# Altium PCB PCB1.PcbDoc
Units mil, origin at the board's own origin, x right, y up, seen from the top; angles counter-clockwise.
Board outline 6299 x 3937 mil, 4 copper layers (Component Side, Ground Plane, Signal Layer 1, Solder Side), stack 33.234 mil thick; 62 components, 56 nets, 405 pads, 33 vias.
Unrouted connection lines stored in the file: 6.
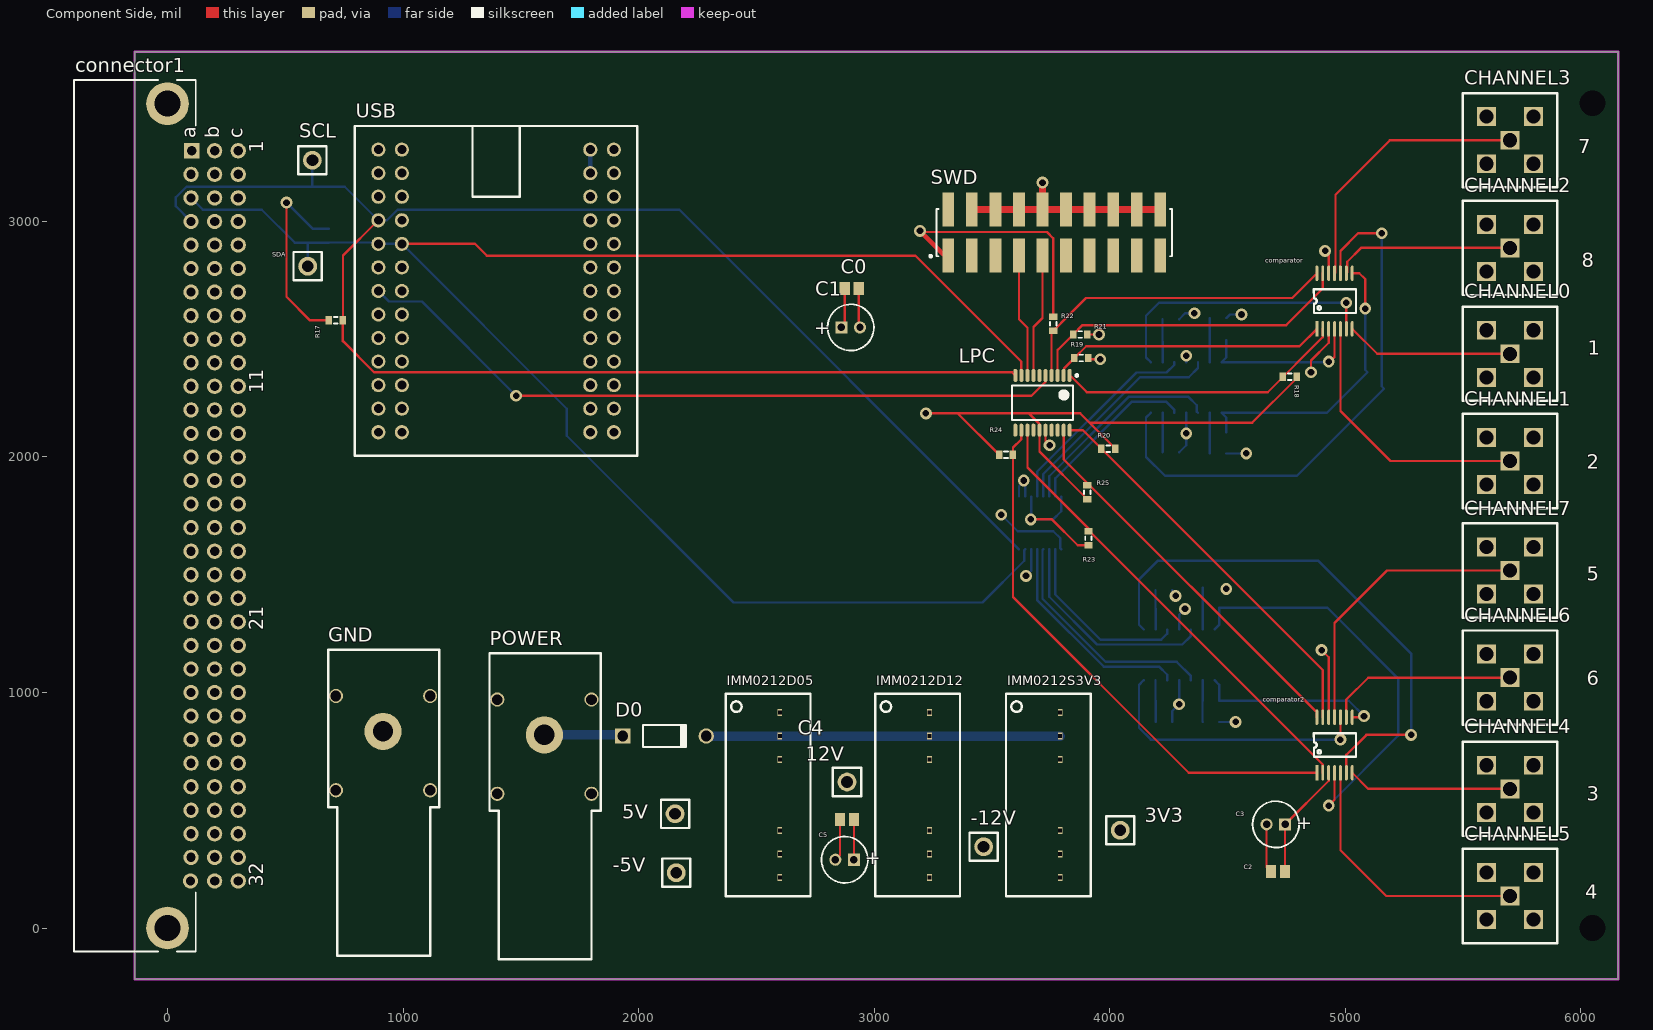
[diagram p0: Component Side view]
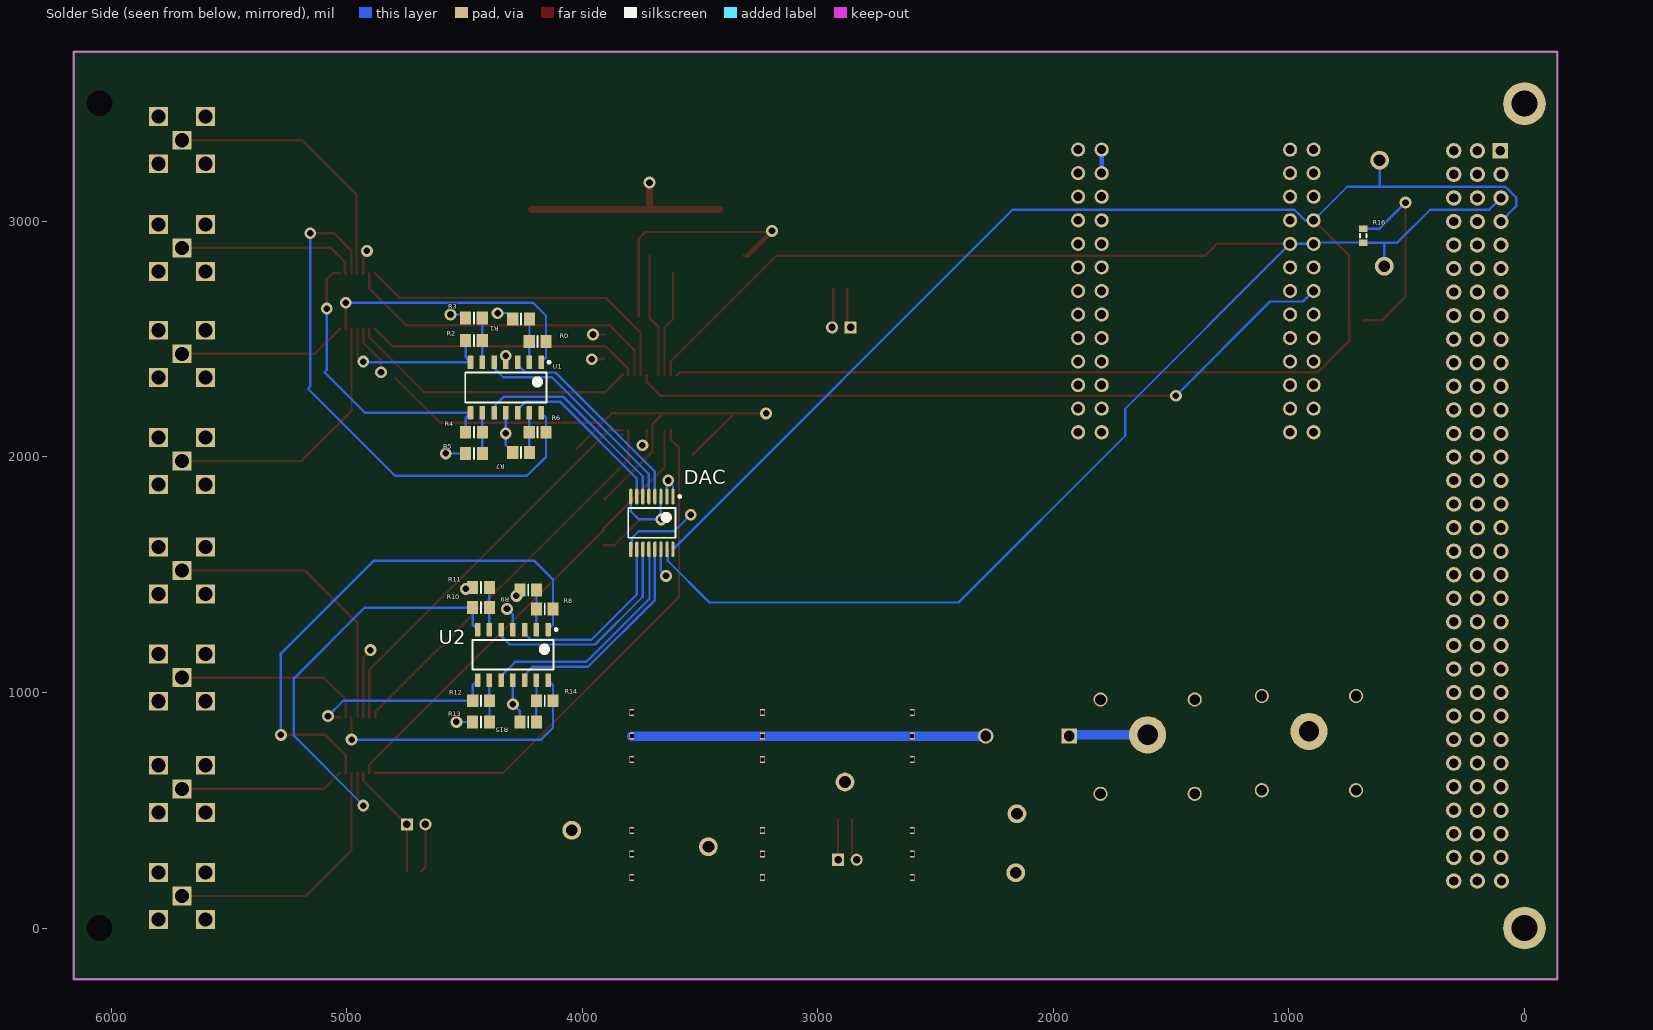
[diagram p1: Solder Side view, seen from below]
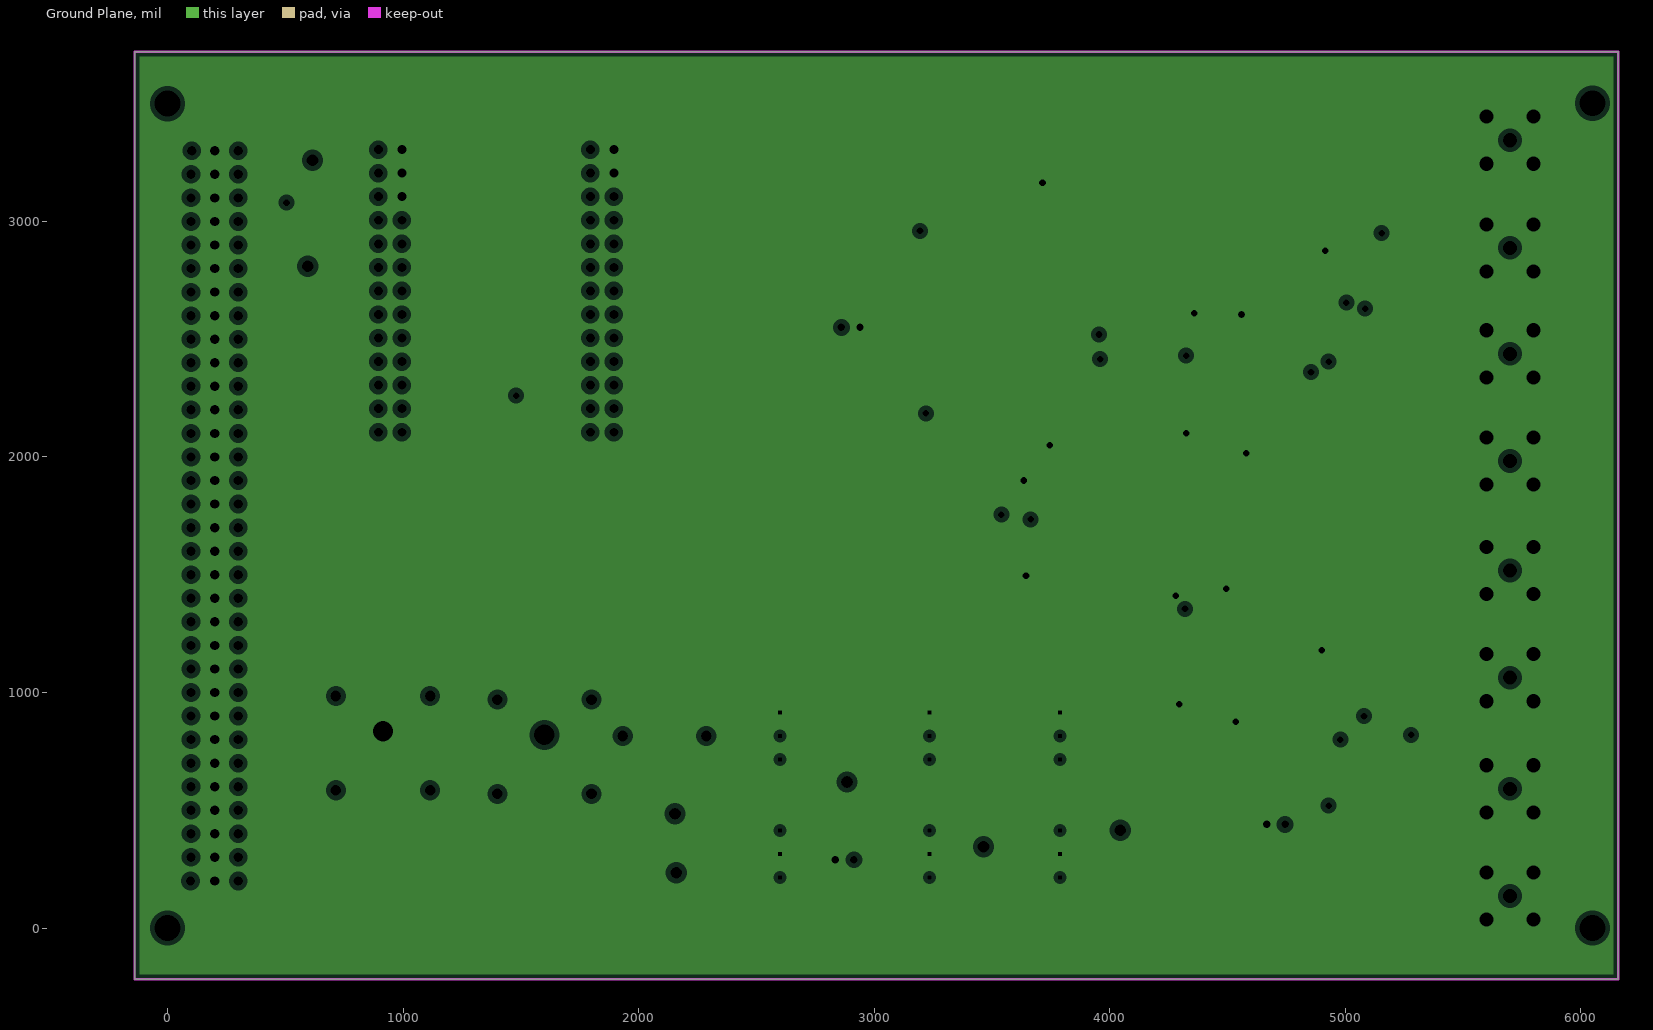
[diagram p2: Ground Plane, clearances drawn from the general rule]
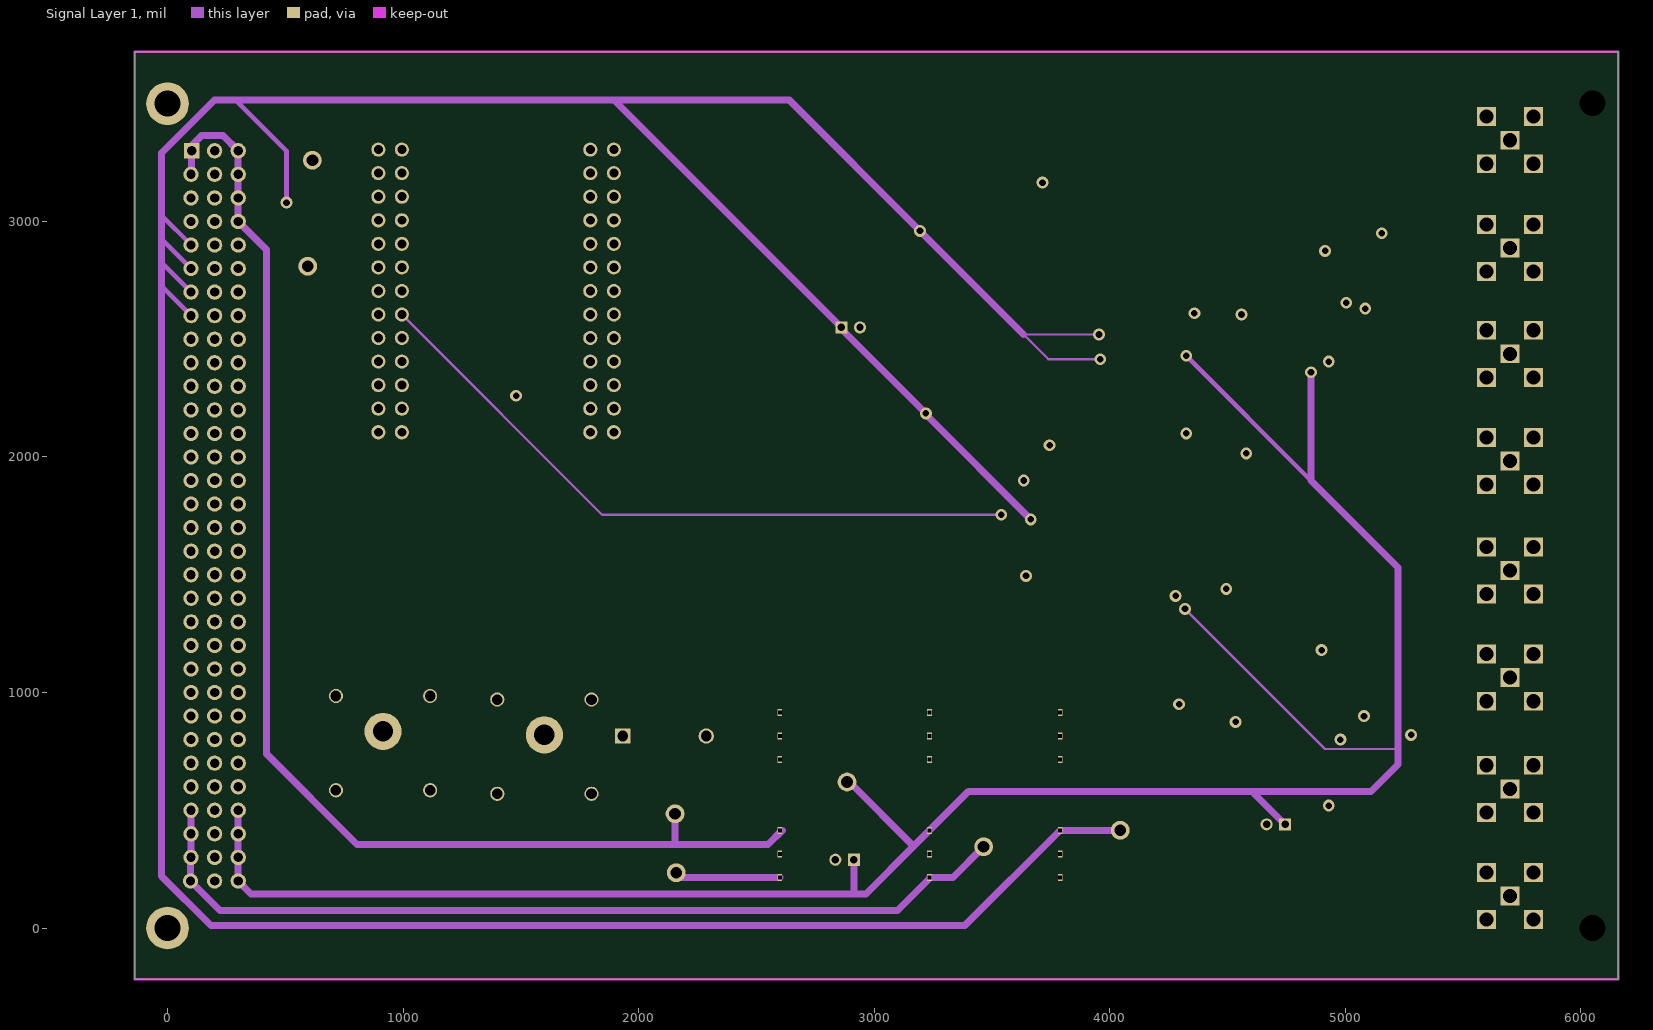
[diagram p3: Signal Layer 1]

## Layer stack, top to bottom
Top Solder: solder mask 0.4, Solder Resist, Dk 3.5
Component Side: signal copper 1.4
Dielectric 1: core 12.6, FR-4, Dk 4.8
Ground Plane: plane copper 1.417, net GND
Dielectric 3: prepreg 5, Dk 4.2
Signal Layer 1: signal copper 1.417
Dielectric 4: core 10, Dk 4.2
Solder Side: signal copper 1.4
Bottom Solder: solder mask 0.4, Solder Resist, Dk 3.5

## Board outline
-140,-217 6159,-217 6159,3720 -140,3720

## Design rules (kind name [scope] priority, off if disabled: settings)
Clearance [All] p1: gap=10 ignorepadtopadclearanceinfootprint=TRUE except(0: Arc-Hole Track-Hole SMDPad-Hole THPad-Hole Via-Hole Fill-Hole Poly-Hole Region-Hole Text-Hole)
PlaneClearance [All] p1: clearance=20
PlaneConnect [All] p1: planeconnectstyle=Relief reliefexpansion=20 reliefentries=4 reliefconductorwidth=10 reliefairgap=10
PolygonConnect [All] p1: connectstyle=Relief reliefconductorwidth=10 reliefentries=4 polygonreliefangle="90 Angle" airgapwidth=10
RoutingVias [All] p1: holewidth=28 width=50 viastyle="Through Hole" minholewidth=28 minwidth=50 maxholewidth=28 maxwidth=50
SolderMaskExpansion [All] p1: expansion=4
Width [All] p1: maxlimit=40 minlimit=10 preferedwidth=10 minimp=50.000000 maximp=50.000000 favimp=50.000000
28 further rules are at their usual default settings.

## Classes and differential pairs
component class Sheet2: 3V3 5V 12V -5V -12V connector1 D0 GND IMM0212D05 IMM0212D12 IMM0212S3V3 LPC POWER R16 R17 R18 R19 R20 R21 R22 R23 R25 SCL SDA SWD USB
component class Sheet4: C0 C1 C2 C3 C4 C5 CHANNEL0 CHANNEL1 CHANNEL2 CHANNEL3 CHANNEL4 CHANNEL5 CHANNEL6 CHANNEL7 comparator comparator2 DAC P1A P2A P2B R0 R1 R2 R3 R4 R5 R6 R7 R8 R9 R10 R11 R12 R13 R14 R15 U1 U2

## Components (designator, comment, footprint, x,y, rotation, side; value= is the part's Value field where it differs from the comment)
3V3 "Socket" CON1 4045,415 r0 top
5V "Socket" CON1 2155,485 r0 top
12V "Socket" CON1 2885,620 r0 top
-5V "Socket" CON1 2160,235 r0 top
-12V "Socket" CON1 3465,345 r90 top
C0 "100nF" C0805 2905,2715 r180 top
C1 "ECA-1HM100" CAPPR55-200-1100X500X1200 2900.63,2550 r0 top
C2 "100nF" C0805 4715,240 r0 top
C3 "ECA-1HM100" CAPPR55-200-1100X500X1200 4705.63,440 r180 top
C4 "100nF" C0805 2885,460 r0 top
C5 "ECA-1HM100" CAPPR55-200-1100X500X1200 2875,290 r180 top
CHANNEL0 "IN0" SMB 5700,2438 r0 top
CHANNEL1 "IN0" SMB 5700,1983 r0 top
CHANNEL2 "IN0" SMB 5700,2887.6 r0 top
CHANNEL3 "IN0" SMB 5700,3345 r0 top
CHANNEL4 "IN0" SMB 5700,590.9 r0 top
CHANNEL5 "IN0" SMB 5700,135.9 r0 top
CHANNEL6 "IN0" SMB 5700,1063 r0 top
CHANNEL7 "IN0" SMB 5700,1518 r0 top
comparator "LM2901PW" TSSOP-14 4880,2544 r90 top
comparator2 "LM2901PW" TSSOP-14 4880,659 r90 top
connector1 "09 73 296 6801" 0973296X801 -397.64,1750 r90 top
D0 "1N4001-T" DIOD-DO-41-P-2_V 2110,815 r0 top
DAC "DAC6578SPWR" TI-PW16_N 3705,1720 r270 bottom
GND "-" RA 915,835 r90 top
IMM0212D05 "+-5V" SIP8 2600,915 r270 top
IMM0212D12 "+-12V" SIP8 3235,915 r270 top
IMM0212S3V3 "3V3" SIP8 3790,915 r270 top
LPC "LPC824M201JDH20J" NXP-SOT360-1_N 3715,2230 r270 top
POWER "+" RA 1600,820 r90 top
R0 "1k-0W25-0805" 6-0805_N 4190,2490 r180 bottom value=2k
R1 "1k-0W25-0805" 6-0805_N 4260,2585 r180 bottom value=1k
R2 "1k-0W25-0805" 6-0805_N 4460.43,2495 r0 bottom value=2k
R3 "1k-0W25-0805" 6-0805_N 4460.43,2590 r180 bottom value=1k
R4 "1k-0W25-0805" 6-0805_N 4460,2105 r0 bottom value=2k
R5 "1k-0W25-0805" 6-0805_N 4460,2015 r180 bottom value=1k
R6 "1k-0W25-0805" 6-0805_N 4190,2105 r180 bottom value=2k
R7 "1k-0W25-0805" 6-0805_N 4260,2020 r180 bottom value=1k
R8 "1k-0W25-0805" 6-0805_N 4160,1355 r180 bottom value=2k
R9 "1k-0W25-0805" 6-0805_N 4230,1435 r180 bottom value=1k
R10 "1k-0W25-0805" 6-0805_N 4430.43,1360 r0 bottom value=2k
R11 "1k-0W25-0805" 6-0805_N 4430.43,1445 r180 bottom value=1k
R12 "1k-0W25-0805" 6-0805_N 4430,965 r0 bottom value=2k
R13 "1k-0W25-0805" 6-0805_N 4430.43,875 r180 bottom value=1k
R14 "1k-0W25-0805" 6-0805_N 4160,965 r180 bottom value=2k
R15 "1k-0W25-0805" 6-0805_N 4230,875 r180 bottom value=1k
R16 "Res3" J1-0603 685,2940 r90 bottom value=1K
R17 "Res3" J1-0603 715,2580 r180 top value=1K
R18 "Res3" J1-0603 4765,2340 r0 top value=1K
R19 "Res3" J1-0603 3880,2420 r0 top value=1K
R20 "Res3" J1-0603 3995,2035 r0 top value=1K
R21 "Res3" J1-0603 3875,2520 r0 top value=1K
R22 "Res3" J1-0603 3760,2565 r90 top value=1K
R23 "Res3" J1-0603 3910,1655 r270 top value=1K
R24 "Res3" J1-0603 3560,2010 r180 top value=1K
R25 "Res3" J1-0603 3905,1850 r270 top value=1K
SCL "Socket" CON1 615,3260 r0 top
SDA "Socket" CON1 595,2810 r0 top
SWD "TSM-110-01-S-DV" SMTC-TSM-110-01-X-DV 3765,2952.56 r0 top
U1 "LM324AM" D0014A_N 4325,2295 r270 bottom
U2 "LM324AM" D0014A_N 4295,1160 r270 bottom
USB "FT4232MM" FT4232MM 895,3305 r0 top

## Footprints (in the part's own frame and the unit in brackets; to place one, negate y for a bottom-side part, rotate by r counter-clockwise, add the part's x,y. Pads: shape width x height; smd on the part's side, far side on the other; paste and mask are expansions set on the pad)
6-0805_N [mm] "Chip Resistor, Body 2.0x1.2mm, IPC Medium Density"
  rect 1.2x1.4 smd: 1(-0.9,0) 2(0.9,0)
  silkscreen extent 0,-0.6 0,0.6, body extent -1.07,-0.7 1.07,0.7, height 0.7
0973296X801 [mm] "Connector; DIN 41612, Type R, Thru-Hole; Rows a+b+c, 96 Position; Right Angle"
  round 4.6 hole 2.8: 33(-44.45,-10.1) 34(44.45,-10.1)
  rect 1.65x1.65 hole 1: A1(39.37,-12.7)
  round 1.65 hole 1: A2(36.83,-12.64) A3(34.29,-12.64) A4(31.75,-12.64) A5(29.21,-12.64) A6(26.67,-12.64) A7(24.13,-12.64) A8(21.59,-12.64) A9(19.05,-12.64) A10(16.51,-12.64) A11(13.97,-12.64) A12(11.43,-12.64) A13(8.89,-12.64) A14(6.35,-12.64) A15(3.81,-12.64) A16(1.27,-12.64) A17(-1.27,-12.64) A18(-3.81,-12.64) A19(-6.35,-12.64) A20(-8.89,-12.64) A21(-11.43,-12.64) A22(-13.97,-12.64) A23(-16.51,-12.64) A24(-19.05,-12.64) A25(-21.59,-12.64) A26(-24.13,-12.64) A27(-26.67,-12.64) A28(-29.21,-12.64) A29(-31.75,-12.64) A30(-34.29,-12.64) A31(-36.83,-12.64) A32(-39.37,-12.573) B1(39.37,-15.18) B2(36.83,-15.18) B3(34.29,-15.18) B4(31.75,-15.18) B5(29.21,-15.18) B6(26.67,-15.18) B7(24.13,-15.18) B8(21.59,-15.18) B9(19.05,-15.18) B10(16.51,-15.18) B11(13.97,-15.18) B12(11.43,-15.18) B13(8.89,-15.18) B14(6.35,-15.18) B15(3.81,-15.18) B16(1.27,-15.18) B17(-1.27,-15.18) B18(-3.81,-15.18) B19(-6.35,-15.18) B20(-8.89,-15.18) B21(-11.43,-15.18) B22(-13.97,-15.18) B23(-16.51,-15.18) B24(-19.05,-15.18) B25(-21.59,-15.18) B26(-24.13,-15.18) B27(-26.67,-15.18) B28(-29.21,-15.18) B29(-31.75,-15.18) B30(-34.29,-15.18) B31(-36.83,-15.18) B32(-39.37,-15.18) C1(39.37,-17.72) C2(36.83,-17.72) C3(34.29,-17.72) C4(31.75,-17.72) C5(29.21,-17.72) C6(26.67,-17.72) C7(24.13,-17.72) C8(21.59,-17.72) C9(19.05,-17.72) C10(16.51,-17.72) C11(13.97,-17.72) C12(11.43,-17.72) C13(8.89,-17.72) C14(6.35,-17.72) C15(3.81,-17.72) C16(1.27,-17.72) C17(-1.27,-17.72) C18(-3.81,-17.72) C19(-6.35,-17.72) C20(-8.89,-17.72) C21(-11.43,-17.72) C22(-13.97,-17.72) C23(-16.51,-17.72) C24(-19.05,-17.72) C25(-21.59,-17.72) C26(-24.13,-17.72) C27(-26.67,-17.72) C28(-29.21,-17.72) C29(-31.75,-17.72) C30(-34.29,-17.72) C31(-36.83,-17.72) C32(-39.37,-17.72)
  silkscreen extent -47,-13.14 47,0
C0805 [mm] "Chip Capacitor, Body 2.0x1.3mm, IPC High Density"
  rect 1.1x1.4 smd: 1(-0.75,0) 2(0.75,0)
  body extent -1.1,-0.72 1.1,0.72, height 1.4
CAPPR55-200-1100X500X1200 [mm] "THD, 2-Leads, Dia 5mm, Body Length 11mm"
  rect 1.3x1.3 hole 0.8: 1(-1,0)
  round 1.3 hole 0.8: 2(1,0)
  silkscreen extent -2.5,-2.5 2.5,2.5, body extent -2.5,-2.5 2.5,2.5, height 12
CON1 [mil]
  round 80 hole 50: 1(0,0)
  silkscreen extent -60,-60 60,60
D0014A_N [mm] "SOIC, 14-Leads, Body 8.75x4mm, Pitch 1.27mm, IPC Medium Density"
  rrect17% 1.45x0.6 smd: 1(-2.725,3.81) 2(-2.725,2.54) 3(-2.725,1.27) 4(-2.725,0) 5(-2.725,-1.27) 6(-2.725,-2.54) 7(-2.725,-3.81) 8(2.725,-3.81) 9(2.725,-2.54) 10(2.725,-1.27) 11(2.725,0) 12(2.725,1.27) 13(2.725,2.54) 14(2.725,3.81)
  silkscreen extent -2.85,-4.38 1.6,4.78, body extent -3.02,-4.32 3.02,4.32, height 1.59
DIOD-DO-41-P-2_V [mm] "2-Leads, Axial Lead, Body 4.635x2.36mm, Pin Spacing 9mm"
  rect 1.65x1.65 hole 1.15: 1(-4.5,0)
  round 1.65 hole 1.15: 2(4.5,0)
  silkscreen extent -2.32,-1.18 2.32,1.18, body extent -4.93,-1.18 4.93,1.18, height 2.35
FT4232MM [mil] "FT4232 mini module/USB interface"
  round 60 hole 38: 1(0,0) 2(100,0) 3(0,-100) 4(100,-100) 5(0,-200) 6(100,-200) 7(0,-300) 8(100,-300) 9(0,-400) 10(100,-400) 11(0,-500) 12(100,-500) 13(0,-600) 14(100,-600) 15(0,-700) 16(100,-700) 17(0,-800) 18(100,-800) 19(0,-900) 20(100,-900) 21(0,-1000) 22(100,-1000) 23(0,-1100) 24(100,-1100) 25(0,-1200) 26(100,-1200) 27(900,0) 28(1000,0) 29(900,-100) 30(1000,-100) 31(900,-200) 32(1000,-200) 33(900,-300) 34(1000,-300) 35(900,-400) 36(1000,-400) 37(900,-500) 38(1000,-500) 39(900,-600) 40(1000,-600) 41(900,-700) 42(1000,-700) 43(900,-800) 44(1000,-800) 45(900,-900) 46(1000,-900) 47(900,-1000) 48(1000,-1000) 49(900,-1100) 50(1000,-1100) 51(900,-1200) 52(1000,-1200)
  silkscreen extent -100,-1300 1100,100
J1-0603 [mm] "Chip Resistor, Body 1.6x0.8mm, IPC High Density"
  rect 0.7x0.9 smd: 1(-0.75,0) 2(0.75,0)
  silkscreen extent -0.2,-0.35 0.2,0.35, body extent -0.85,-0.48 0.85,0.48, height 0.9
NXP-SOT360-1_N [mm] "SOP, 20-Leads, Body 6.6x4.5mm, Pitch 0.65mm, IPC Medium Density"
  oval 1.4x0.45 smd: 1(-2.95,2.925) 2(-2.95,2.275) 3(-2.95,1.625) 4(-2.95,0.975) 5(-2.95,0.325) 6(-2.95,-0.325) 7(-2.95,-0.975) 8(-2.95,-1.625) 9(-2.95,-2.275) 10(-2.95,-2.925) 11(2.95,-2.925) 12(2.95,-2.275) 13(2.95,-1.625) 14(2.95,-0.975) 15(2.95,-0.325) 16(2.95,0.325) 17(2.95,0.975) 18(2.95,1.625) 19(2.95,2.275) 20(2.95,2.925)
  silkscreen extent -3.07,-3.3 1.85,3.83, body extent -2.25,-3.3 2.25,3.3, height 1.1
RA [mil] "Power socket"
  round 157.48 hole 86.61: 1(0,0)
  round 60 hole 45: ""(-250,-200) ""(-250,200) ""(150,-200) ""(150,200)
  silkscreen extent -952,-239 347,233
SIP8 [mil]
  rect 30x20 hole 15 square: 1(0,0) 2(100,0) 3(200,0) 6(500,0) 7(600,0) 8(700,0)
  silkscreen extent -80,-230 780,130
SMB [mil] "SMB connector farnell code 1206013"
  rect 80x80 hole 60: 1(0,0) 2(-100,-100) 2(-100,100) 2(100,-100) 2(100,100)
  silkscreen extent -200,-200 200,200
SMTC-TSM-110-01-X-DV [mm] "Double Row Gullwing ASM, 2x10 Pins, Vertical, 2.54mm Pitch, Male"
  rect 1.27x3.68 smd: 1(-11.43,-2.475) 2(-11.43,2.475) 3(-8.89,-2.475) 4(-8.89,2.475) 5(-6.35,-2.475) 6(-6.35,2.475) 7(-3.81,-2.475) 8(-3.81,2.475) 9(-1.27,-2.475) 10(-1.27,2.475) 11(1.27,-2.475) 12(1.27,2.475) 13(3.81,-2.475) 14(3.81,2.475) 15(6.35,-2.475) 16(6.35,2.475) 17(8.89,-2.475) 18(8.89,2.475) 19(11.43,-2.475) 20(11.43,2.475)
  silkscreen extent -13.46,-2.66 12.7,2.54, body extent -12.7,-3.68 12.7,3.68, height 9.65
TI-PW16_N [mm] "SOP, 16-Leads, Body 5x4.4mm, Pitch 0.65mm, IPC Medium Density"
  oval 1.7x0.35 smd: 1(-2.85,2.275) 2(-2.85,1.625) 3(-2.85,0.975) 4(-2.85,0.325) 5(-2.85,-0.325) 6(-2.85,-0.975) 7(-2.85,-1.625) 8(-2.85,-2.275) 9(2.85,-2.275) 10(2.85,-1.625) 11(2.85,-0.975) 12(2.85,-0.325) 13(2.85,0.325) 14(2.85,0.975) 15(2.85,1.625) 16(2.85,2.275)
  silkscreen extent -2.97,-2.55 1.6,3.12, body extent -2.25,-2.55 2.25,2.55, height 1.2
TSSOP-14 [mil]
  rect 65x12.5 smd: 1(0,0)
  oval 65x12.5 smd: 2(0,-25) 3(0,-50) 4(0,-75) 5(0,-100) 6(0,-125) 7(0,-150) 8(236,-150) 9(236,-125) 10(236,-100) 11(236,-75) 12(236,-50) 13(236,-25) 14(236,0)
  silkscreen extent 68,-166 168,13

## Part data
C0 C2 C4: library part "Ceramic 100nF/50V", "Capacitor Cer 50V 0805 Vishay X7R", Supplier Part Number 1=1612208, PackageReference=0805, Supplier 1=Farnell
C1 C3 C5: library part CMP-1665-00038-1, "Aluminum Electrolytic Capacitor, 10 uF, +/- 20%, 50 V, -40 to 85 degC, 2-Pin THD, RoHS, Bulk", Case\Package=SOIC, Max Operating Temperature="70 degC", Max Ouput Current="200 mA", Max Power Dissipation="625 mW", Max Supply Voltage="16 V", Min Operating Temperature="0 degC", Min Supply Voltage="4.5 V", Nominal Supply Current="10 mA", Package Quantity=2500, ComponentLink1Description="Manufacturer URL", ComponentLink1URL=http://www.panasonic.com/, ComponentLink2Description=Datasheet, ComponentLink2URL=http://industrial.panasonic.com/cdbs/www-data/pdf/RDF0000/DMF0000COL68.pdf, DatasheetVersion=Mar-16, Height="1.5 mm", Length="5 mm", Mount="Surface Mount", PackageDescription="2-Pin Radial Lead, Dia 5 mm, Body Length 11 mm", PackageReference=CAPPR55-200-1100X500X1200, Packaging="Tape and Reel", Pins=8, Radiation Hardening=No, RoHSCompliant=true, Width="4 mm"
CHANNEL0 CHANNEL1 CHANNEL2 CHANNEL3 CHANNEL4 CHANNEL5 CHANNEL6 CHANNEL7: library part SMB, "SMB Straight Connector", Supplier Part Number 1=1206013, LatestRevisionDate=17-Jul-2002, LatestRevisionNote="Re-released for DXP Platform.", Publisher="Altium Limited", Supplier 1=Farnell
comparator comparator2: Supplier Part Number 1=2295995, Supplier 1=Farnell
connector1: "Eurocard DIN 41612, Type R, 96 Position, Rows a+b+c, Performance level 2, Female, Lead 3.0 mm, Pitch 2.54 mm", PackageDocument=17-Aug-1998, Supplier Part Number 1=1096942, ComponentLink1Description="Manufacturer Link", ComponentLink1URL=http://www.harting.com/, ComponentLink2Description="Packaging Specification", ComponentLink2URL=http://www.harkis.harting.com/_gds/pdf/TB_0973296x801_BL01_R31100.pdf, DatasheetDocument=24-Nov-2004, DrillSize="Corresponds to nominal value.", PackageReference=0973296X801, Published=6-Oct-2005, Publisher="Altium Limited", Supplier 1=Farnell
D0: library part CMP-0639-00006-2, "1.0 A Rectifier, 15 pF, 50 V, -65 to 150 degC, 2-Pin DO-41 Plastic, RoHS, Tape and Reel", Manufacturer="Diodes Inc", Max. Average Rectified Current IO (A)=1, Operating Temperature Range (degC)="-65 to 150", ComponentLink1Description="Manufacturer URL", ComponentLink1URL=http://diodes.com/, ComponentLink2Description=Datasheet, ComponentLink2URL=http://diodes.com/datasheets/ds28002.pdf, CT (pF)=15, DatasheetVersion="Rev. 8-2", Max. IFSM (A)=30, Max. IR (uA)=5, Mounting Technology="Through Hole", PackageDescription="2-Pin Axial Lead, Body 4.635 x 2.36 mm, Lead Spread 25.4 mm", PackageReference=DO-41-P-2, Packing="Tape and Reel", PartNumber=1N4001-T, RoHS=TRUE, VF (V)=1, VRRM (V)=50
DAC: library part CMP-0004-01130-1, "10-Bit, Octal Channel, Ultra-Low Glitch, Voltage Output, 2-Wire Interface DAC, -40 to 125 degC, 16-pin SOP (PW16), Green (RoHS & no Sb/Br)", Manufacturer="Texas Instruments", Power Consumption(Typ)(mW)=3.67, Supplier Part Number 1=1854519, Code_JEDEC=MO-153, ComponentLink1Description="Manufacturer URL", ComponentLink1URL=http://www.ti.com/, ComponentLink2Description=Datasheet, ComponentLink2URL=http://www.ti.com/general/docs/lit/getliterature.tsp?genericPartNumber=DAC6578&fileType=pdf, ComponentLink3Description="Package Specification", ComponentLink3URL=http://www.ti.com/lit/ml/mpds361/mpds361.pdf, DAC Channels=8, DatasheetVersion=SBAS496A, DNL(Max)(+/-LSB)=0.5, Eco-Plan="Green (RoHS & no Sb/Br)", INL(Max)(+/-LSB)=0.5, Interface="Serial I2C", Mounting Technology="Surface Mount", PackageDescription="16-Pin Plastic Small Outline, Body 5 x 4.4 mm, Pitch 0.65 mm", PackageReference=PW16, PackageVersion="4040064-4/G, 02/2011", PartNumber=DAC6578SPWR, Resolution(Bits)=10, Settling Time(us)=7, SubFamily="Precision DAC (=<10MSPS)", Supplier 1=Farnell
GND POWER: library part Power
IMM0212D05 IMM0212D12: library part IMM0212D05
IMM0212S3V3: library part Component_1
LPC: library part CMP-0173-00095-1, "32-bit ARM Cortex-M0+ Microcontroller, 16 I/O, 32 KB Flash, 8 KB SRAM, -40 to 105 degC, 20-Pin TSSOP, Reel, RoHS", Manufacturer="NXP Semiconductors", PartNumber=LPC824M201JDH20, Clock Speed="30 MHz max.", Code_JEDEC=MO-153, ComponentLink1Description="Manufacturer URL", ComponentLink1URL=www.nxp.com, ComponentLink2Description=Datasheet, ComponentLink2URL=http://www.nxp.com/documents/data_sheet/LPC82X.pdf, ComponentLink3Description="Package Specification", ComponentLink3URL=http://www.nxp.com/documents/outline_drawing/sot360-1_po.pdf, Core=Cortex-M0+, DatasheetVersion="Rev. 1", Flash="32 KB", Mounting Technology="Surface Mount", PackageDescription="20-Pin Plastic Thin Shrink Small Outline Package, Body 6.5 x 4.4 mm, Pitch 0.65 mm", PackageVersion="03-02-19, 02/2003", Packing=Reel, RAM="8 KB"
R0 R2 R4 R6 R8 R10 R12 R14: "Resistor", Supplier Part Number 1=2057613, LatestRevisionDate=17-Jul-2002, LatestRevisionNote="Re-released for DXP Platform.", PackageReference=AXIAL-0.4, Published=8-Jun-2000, Publisher="Altium Limited", Supplier 1=Farnell
R1 R3 R5 R7 R9 R11 R13 R15: "Resistor", Supplier Part Number 1=1750754, LatestRevisionDate=17-Jul-2002, LatestRevisionNote="Re-released for DXP Platform.", PackageReference=AXIAL-0.4, Published=8-Jun-2000, Publisher="Altium Limited"
R16 R17 R18 R19 R20 R21 R22 R23 R24 R25: "Resistor", LatestRevisionDate=29-May-2009, LatestRevisionNote="IPC-7351 Footprint Added.", PackageDescription="Chip Resistor", PackageReference=J1-0603, Published=8-Jun-2000, Publisher="Altium Limited"
SWD: library part CMP-1024-00283-1, "0.025\" SQ Post Header, Surface Mount, Vertical, -55 to 125 degC, 2.54 mm Pitch, 20-Pin, Male, RoHS", Manufacturer=Samtec, Temperature Range="-55 to 125 degC", ComponentLink1Description="Manufacturer URL", ComponentLink1URL=http://www.samtec.com, ComponentLink2Description=Datasheet, ComponentLink2URL=http://www.samtec.com/documents/webfiles/pdf/TSM.PDF, ComponentLink3Description="Package Specification", ComponentLink3URL=http://www.samtec.com/documents/webfiles/cpdf/TSM-1XX-XX-XXX-XX-X-XXX-X-MKT.pdf, DatasheetVersion=F-214, Mounting Technology="Surface Mount", Orientation=Vertical, PackageDescription="Double Row Gullwing ASM", PackageReference=TSM-110-01-X-DV, PackageVersion="DJ, 4/1991", PartNumber=TSM-110-01-S-DV, Pitch="2.54 mm", RoHS=True
U1 U2: library part CMP-0055-00794-3, "Low Power Quad Operational Amplifier, 14-pin Narrow SOIC", Manufacturer="Texas Instruments", Package Reference=D0014A, PackageTopMarking=NSUZXYTTE#*LM324AM, PowerWise=N, Supplier Part Number 1=2450779, Code_IPC=SOIC127P600-14, Code_JEDEC=MS-012AB, ComponentLink1Description="Datasheet URL", ComponentLink1URL=http://www.ti.com/general/docs/lit/getliterature.tsp?genericPartNumber=LM324-N&fileType=pdf, CompType=Amplifiers, PackageDescription="Molded Package S.O., .150in Wide, 14 Lead", PartId=1, PinCount=14, RoHS=N, Supplier 1=Farnell
USB: "FDTI mini module"
3V3 5V 12V -5V -12V SCL SDA: LatestRevisionDate=17-Jul-2002, LatestRevisionNote="Re-released for DXP Platform.", Publisher="Altium Limited"

## Free pads (board coordinates)
  round 50 hole 110: 7(6050,0)
  round 60 hole 110: 8(6050,3502)

## Via types
v1: diameter 50, hole 28, Component Side to Solder Side, 33 vias

## Nets (pads, with @x,y where several pads share a name; then routed paths per layer and width w, separated by ;. In a path a pad name is that pad's centre, name@x,y a point inside that pad or via, vN(x,y) a via of type N, cw(c..) or ccw(c..) an arc to the next point about the centre after c; other vN are vias at no path point)
3V3: 3V3.1 C0.2 C1.1 connector1.A5 connector1.A6 connector1.A7 connector1.A8 DAC.3 DAC.8 IMM0212S3V3.6 LPC.15 R16.2 R17.2 R18.2 R19.2 R20.2 R21.2 R22.2 R23.2 R24.2 R25.2 SWD.1 | length 21304.6
  Component Side w10: v1(505,3080) 505,2680 605,2580 R17.2 ; C1.1 2875.47,2564.21 C0.2 ; v1(3195,2960) 3200,2955 3733.77,2955 3760,2928.77 R22.2 ; v1(3220,2185) 3355.47,2185 ; SWD.1@3299.88,2855.12 SWD.1 ; R24.2 3355.47,2185 ; v1(3665,1735) 3755,1735 3864.53,1625.47 R23.2 ; 3875,2184.53 3914.53,2145 ; 3875,2185 3657.91,2185 ; R21.2 v1(3955,2520) ; R25.2 3702.2,2023.27 LPC.15 3700.47,2115.59 3700.47,2142.44 3657.91,2185 ; R19.2 3914.53,2415 v1(3960,2415) ; R20.2 3914.53,2145 ; R18.2@4792.5,2332.5 4605,2145 3914.53,2145 ; 3355.47,2185 3657.91,2185
  Component Side w20: v1@3200,2955 SWD.1@3299.88,2855.12
  Signal Layer 1 w10: -25,2720 -20,2720 ; 1895,3515 1896.26,3515 ; C1.1@2861.26,2543.74 C1.1 ; v1(3955,2520) 3635,2520 3740,2415 v1(3960,2415)
  Signal Layer 1 w20: -25,2825 connector1.A7 ; -25,2925 connector1.A6 ; -25,3025 connector1.A5 ; -20,2720 connector1.A8 ; 290,3515 505,3300 v1(505,3080)
  Signal Layer 1 w30: 1895,3515 290,3515 200,3515 -25,3290 -25,3025 -25,2925 -25,2825 -25,2720 -25,220 185,10 3385,10 IMM0212S3V3.6@3785,410 ; C1.1@2861.26,2543.74 v1(3220,2185) 3220,2180 v1(3665,1735) ; C1.1 1896.26,3515 2640,3515 v1(3195,2960) 3635,2520 ; IMM0212S3V3.6 3V3.1
  Solder Side w10: v1(505,3080) 615.47,2969.53 R16.2 ; DAC.3 3666.61,1736.61 v1(3665,1735) 3760,1735 3794.57,1769.57 DAC.8
5V: 5V.1 connector1.A1 connector1.A2 connector1.C1 connector1.C2 connector1.C3 connector1.C4 IMM0212D05.6 | length 5481.7
  Signal Layer 1 w10: connector1.A2 connector1.A2@102.36,3202.36 ; connector1.A1 connector1.A1@102.36,3322.36 ; 2150,355 2155,360
  Signal Layer 1 w30: connector1.A2@102.36,3202.36 connector1.A1 ; connector1.A1@102.36,3322.36 145,3365 235,3365 connector1.C1 connector1.C2 connector1.C3 connector1.C4 420,2880 420,740 805,355 2150,355 2550,355 2610,415 ; 2155,360 5V.1
12V: 12V.1 C2.2 C3.1 C4.2 C5.1 comparator2.3 comparator.3 connector1.C29 connector1.C30 connector1.C31 connector1.C32 IMM0212D12.6 U1.4 U2.4 | length 10940.2
  Component Side w10: C5.1 2914.53,290.16 C4.2 ; C2.2 4744.53,439.53 C3.1 4930,625 comparator2.3 ; v1(4855,2360) 4855,2410 4930,2485 comparator.3
  Signal Layer 1 w10: 12V.1 12V.1@2895,620 ; 2914.37,145.63 2915,145 ; v1(4320,1355) 4915,760 5225,760
  Signal Layer 1 w20: v1(4325,2430) 4855,1900
  Signal Layer 1 w30: connector1.C29 connector1.C30 connector1.C31 connector1.C32 355,145 2915,145 2965,145 3167.5,347.5 ; 12V.1@2895,620 3167.5,347.5 ; 2914.37,145.63 C5.1 ; C3.1 4605,580 ; v1(4855,2360) 4855,1900 5225,1530 5225,760 5225,695 5110,580 4605,580 ; 3167.5,347.5 IMM0212D12.6 3400,580 4605,580
  Solder Side w10: U2.4 4295,1330 v1(4320,1355) ; U1.4 v1(4325,2430)
-5V: -5V.1 IMM0212D05.8 | length 448.3
  Signal Layer 1 w30: -5V.1 2180,215 IMM0212D05.8
-12V: -12V.1 connector1.A29 connector1.A30 connector1.A31 connector1.A32 IMM0212D12.8 | length 3835.3
  Signal Layer 1 w10: connector1.A31@97.36,297.36 connector1.A31 ; IMM0212D12.8@3235,210 IMM0212D12.8
  Signal Layer 1 w30: connector1.A31@97.36,297.36 connector1.A32 222.36,75 3100,75 IMM0212D12.8@3235,210 ; connector1.A31 connector1.A30 connector1.A29 ; IMM0212D12.8 3335,215 -12V.1
CH0: CHANNEL0.1 comparator.7 | length 713.9
  Component Side w10: comparator.7 5136,2438 CHANNEL0.1
CH1: CHANNEL1.1 comparator.5 | length 1156.8
  Component Side w10: comparator.5 4980,2195 5192,1983 CHANNEL1.1
CH2: CHANNEL2.1 comparator.9 | length 765.9
  Component Side w10: comparator.9 5008.75,2783.75 5008.75,2828.75 5067.6,2887.6 CHANNEL2.1
CH3: CHANNEL3.1 comparator.11 | length 1172.3
  Component Side w10: comparator.11 4958.75,2783.75 4958.75,3113.75 5190,3345 CHANNEL3.1
CH4: CHANNEL4.1 comparator2.7 | length 698.2
  Component Side w10: comparator2.7 5098.1,590.9 CHANNEL4.1
CH5: CHANNEL5.1 comparator2.5 | length 1129.4
  Component Side w10: comparator2.5 4980,330 5174.1,135.9 CHANNEL5.1
CH6: CHANNEL6.1 comparator2.9 | length 808.5
  Component Side w10: comparator2.9 5005,970 5098,1063 CHANNEL6.1
CH7: CHANNEL7.1 comparator2.11 | length 1237.4
  Component Side w10: comparator2.11 4955,1295 5178,1518 CHANNEL7.1
DAC0: comparator.6 R0.2 U1.1 | length 1190.1
  Component Side w10: comparator.6 v1(5005,2655)
  Solder Side w10: U1.1 4154.57,2422.72 R0.2 4154.57,2599.57 4210,2655 v1(5005,2655)
DAC1: comparator.4 R2.2 U1.7 | length 714.6
  Component Side w10: v1(4930,2405) 4935,2405 4955,2425 comparator.4
  Solder Side w10: R2.2 4495.87,2423.15 U1.7 4932.28,2402.28 4930,2404.57 v1(4930,2405)
DAC2: comparator.8 R4.2 U1.8 | length 1247
  Component Side w10: comparator.8 5060,2780 5085,2755 v1(5085,2630)
  Solder Side w10: R4.2 4495.43,2167.28 U1.8 4922.72,2187.72 5095,2360 5085,2370 v1(5085,2630)
DAC3: comparator.10 R6.2 U1.14 | length 2358
  Component Side w10: comparator.10 4980,2875 5055,2950 v1(5155,2950)
  Solder Side w10: U1.14 4154.57,2167.28 R6.2 4154.57,2000.43 4235,1920 4795,1920 5165,2290 5155,2300 v1(5155,2950)
DAC4: comparator2.6 R8.2 U2.1 | length 2304.3
  Component Side w10: comparator2.6 5005,735 5090,820 v1(5280,820)
  Solder Side w10: U2.1 4124.57,1287.72 R8.2 4124.57,1479.57 4205,1560 4885,1560 5280,1165 v1(5280,820)
DAC5: comparator2.4 R10.2 U2.7 | length 1796.3
  Component Side w10: v1(4930,520) 4955,545 comparator2.4
  Solder Side w10: U2.7 4465.87,1288.15 R10.2 4925,1360 5225,1060 5225,816.57 4930,521.57 v1(4930,520)
DAC6: comparator2.8 R12.2 U2.8 | length 789.7
  Component Side w10: comparator2.8 5075,895 v1(5080,900)
  Solder Side w10: U2.8 4465.43,1032.28 R12.2 5015,965 v1(5080,900)
DAC7: comparator2.10 R14.2 U2.14 | length 1182.1
  Component Side w10: v1(4980,800) comparator2.10
  Solder Side w10: U2.14 4124.57,1032.28 R14.2 4124.57,850.43 4175,800 v1(4980,800)
GND: C0.1 C1.2 C2.1 C3.2 C4.1 C5.2 CHANNEL0.2 CHANNEL1.2 CHANNEL2.2 CHANNEL3.2 CHANNEL4.2 CHANNEL5.2 CHANNEL6.2 CHANNEL7.2 comparator2.12 comparator.12 connector1.B1 connector1.B2 connector1.B3 connector1.B4 connector1.B5 connector1.B6 connector1.B7 connector1.B8 connector1.B9 connector1.B10 connector1.B11 connector1.B12 connector1.B13 connector1.B14 connector1.B15 connector1.B16 connector1.B17 connector1.B18 connector1.B19 connector1.B20 connector1.B21 connector1.B22 connector1.B23 connector1.B24 connector1.B25 connector1.B26 connector1.B27 connector1.B28 connector1.B29 connector1.B30 connector1.B31 connector1.B32 DAC.1 DAC.2 DAC.14 GND.1 IMM0212D05.1 IMM0212D05.7 IMM0212D12.1 IMM0212D12.7 IMM0212S3V3.1 IMM0212S3V3.7 LPC.16 R1.1 R3.1 R5.1 R7.1 R9.1 R11.1 R13.1 R15.1 SWD.4 SWD.6 SWD.8 SWD.10 SWD.12 SWD.14 SWD.16 SWD.18 SWD.20 U1.11 U2.11 USB.2 USB.4 USB.6 USB.28 USB.30 | length 2905.9
  Component Side w10: C5.2 2855.47,309.84 C4.1 ; C0.1 2934.53,2555.47 C1.2 ; LPC.16 3727.8,2067.2 v1(3745,2050) ; C3.2 4666.26,259.21 C2.1 ; v1(4900,1180) 4930,1150 comparator2.12 ; v1(4915,2875) 4930,2860 comparator.12
  Component Side w30: SWD.4 SWD.6 SWD.8 SWD.10 ; v1(3715,3165) SWD.10 ; SWD.20 SWD.18 SWD.16 SWD.14 SWD.12 SWD.10
  Solder Side w10: DAC.1 3615.43,1875.43 3635,1895 v1(3635,1900) 3641.02,1893.98 DAC.2 ; v1(3645,1495) 3666.61,1516.61 DAC.14 ; R15.1 4265.43,920.43 v1(4295,950) U2.11 ; R9.1 4265.43,1424.57 v1(4280,1410) ; R7.1 4325,2049.57 v1(4325,2100) U1.11 ; R1.1 4320.43,2610 v1(4360,2610) ; R13.1 v1(4535,875) ; R5.1 v1(4580,2015) ; R3.1 4510.87,2605 v1(4560,2605)
  other v1: 4495,1440
NetD0_1: D0.1 POWER.1 | length 334.9
  Solder Side w10: D0.1@1927.83,820 D0.1
  Solder Side w40: POWER.1 D0.1@1927.83,820
NetD0_2: D0.2 IMM0212D05.2 IMM0212D12.2 IMM0212S3V3.2 | length 1502.8
  Solder Side w40: D0.2 IMM0212D05.2 IMM0212D12.2 IMM0212S3V3.2
NetDAC_4: DAC.4 U1.3 | length 886.5
  Solder Side w10: DAC.4 3692.2,1937.2 4113.74,2358.74 4241.85,2358.74 4275,2391.89 U1.3
NetDAC_5: DAC.5 U1.5 | length 963.9
  Solder Side w10: DAC.5 3717.8,1927.8 4128.74,2338.74 4336.26,2338.74 4375,2377.48 U1.5
NetDAC_6: DAC.6 U1.10 | length 901.1
  Solder Side w10: DAC.6 3743.39,1918.39 4080,2255 4335,2255 4370,2220 4370,2192.72 U1.10
NetDAC_7: DAC.7 U1.12 | length 744.6
  Solder Side w10: DAC.7 3768.98,1908.98 4095,2235 4240,2235 4275,2200 U1.12
NetDAC_10: DAC.10 U2.3 | length 775.6
  Solder Side w10: DAC.10 3768.98,1416.02 3961.26,1223.74 4218.74,1223.74 4245,1250 U2.3
NetDAC_11: DAC.11 U2.5 | length 929.1
  Solder Side w10: DAC.11 3743.39,1406.61 3946.26,1203.74 4308.74,1203.74 4345,1240 U2.5
NetDAC_12: DAC.12 U2.10 | length 993.9
  Solder Side w10: DAC.12 3715,1605 3715,1398.28 3983.28,1130 4285,1130 4345,1070 U2.10
NetDAC_13: DAC.13 U2.12 | length 921.7
  Solder Side w10: DAC.13 3692.2,1392.8 3975,1110 4210,1110 4245,1075 U2.12
NetLPC_7: LPC.7 SWD.9 | length 527.3
  Component Side w10: LPC.7@3678.35,2347.87 LPC.7 3676.61,2551.61 3715,2590 SWD.9
NetLPC_8: LPC.8 SWD.7 | length 453.8
  Component Side w10: 3615,2782.56 3615,2585 3651.02,2548.98 LPC.8 LPC.8@3649.29,2347.87
NetR0_1: R0.1 R1.2 U1.2 | length 183.3
  Solder Side w10: R1.2 4224.57,2490.87 R0.1 4225.43,2402.72 U1.2
NetR2_1: R2.1 R3.2 U1.6 | length 187.7
  Solder Side w10: U1.6 R2.1 R3.2
NetR4_1: R4.1 R5.2 U1.9 | length 172.9
  Solder Side w10: R5.2 R4.1 4425,2105.43 U1.9
NetR6_1: R6.1 R7.2 U1.13 | length 168.3
  Solder Side w10: R7.2 4225.43,2020.87 R6.1 4225,2105.43 U1.13
NetR8_1: R8.1 R9.2 U2.2 | length 168.3
  Solder Side w10: R9.2 4194.57,1355.87 R8.1 4195.43,1267.72 U2.2
NetR10_1: R10.1 R11.2 U2.6 | length 177.7
  Solder Side w10: U2.6 R10.1 R11.2
NetR12_1: R12.1 R13.2 U2.9 | length 178.1
  Solder Side w10: R13.2 4394.57,875.43 R12.1 4395,965.43 U2.9
NetR14_1: R14.1 R15.2 U2.13 | length 178.3
  Solder Side w10: R15.2 4195.43,875.87 R14.1 4195,965.43 U2.13
NetUSB_1: USB.1 USB.3 USB.5 USB.11 USB.21 USB.38 USB.48
NetUSB_27: USB.27 USB.29 | length 100
  Solder Side w20: USB.29 USB.27
PIN_INT0: comparator.1 LPC.2 R19.1 | length 1173.8
  Component Side w10: LPC.2 3806.3,2347.87 3806.3,2375.83 R19.1 3900.47,2470 4806,2470 comparator.1
PIN_INT1: comparator.2 LPC.1 R18.1 | length 1239.5
  Component Side w10: LPC.1@3828.43,2350 3903.43,2275 4670.96,2275 4905,2509.04 comparator.2
PIN_INT2: comparator.14 LPC.4 R22.1 | length 1413.4
  Component Side w10: LPC.4 3753.39,2528.39 3795,2570 3795,2570.47 3795.47,2570.47 3900,2675 4775,2675 comparator.14
PIN_INT3: comparator.13 LPC.3 R21.1 | length 1407.6
  Component Side w10: LPC.3 3778.98,2455 3780.47,2455 R21.1 3885.47,2560 4750,2560 4905,2715 comparator.13
PIN_INT4: comparator2.1 LPC.12 R24.1 | length 2322.5
  Component Side w10: LPC.12 3625.43,2075.43 3590,2040 3590,1405 4336,659 comparator2.1
PIN_INT5: comparator2.2 LPC.13 R23.1 | length 1976.9
  Component Side w10: LPC.13 3651.02,1955.14 3910,1696.16 R23.1 3914.44,1684.53 4905,693.96 comparator2.2
PIN_INT6: comparator2.14 LPC.19 R25.1 | length 1664.3
  Component Side w10: LPC.19 3804.57,1990.43 4880,915 comparator2.14
PIN_INT7: comparator2.13 LPC.20 R20.1 | length 1697.4
  Component Side w10: LPC.20@3830.16,2094.84 LPC.20@3830.32,2095 ; LPC.20 3886.61,2113.86 R20.1 4905,1095.47 comparator2.13
RESET: LPC.5 USB.13 | length 3068.5
  Component Side w10: v1(1480,2260) 3668.5,2260 3726.06,2317.56 3726.06,2344.41 LPC.5
  Solder Side w10: USB.13 940,2660 1080,2660 v1(1480,2260)
RESET2: DAC.9 USB.16 | length 3238
  Signal Layer 1 w10: USB.16 1845,1755 v1(3540,1755)
  Solder Side w10: v1(3540,1755) 3610,1685 3760.75,1685 3790.87,1654.89 3790.87,1611.5 DAC.9
SCL: connector1.A4 DAC.16 LPC.10 R17.1 SCL.1 USB.7 | length 8007
  Component Side w10: USB.7 745,2855 745,2580.47 R17.1 744.53,2491.83 876.36,2360 3585.98,2360 LPC.10
  Solder Side w10: connector1.A4 35,3065 35,3102.15 80.33,3147.48 615,3147.48 ; SCL.1 615,3147.48 ; DAC.16 2173.23,3050 976.36,3050 931.36,3005 USB.7 752.52,3147.48 615,3147.48
SDA: connector1.A3 DAC.15 LPC.9 R16.1 SDA.1 USB.9 USB.10 | length 7436.3
  Component Side w10: USB.10 1305,2905 1355,2855 3175,2855 3625.43,2404.57 LPC.9
  Solder Side w10: connector1.A3 150,3050 400,3050 540,2910 595,2910 ; SDA.1 595,2910 ; DAC.15 3637.32,1604.09 3637.32,1559.33 3460,1382.01 2402.99,1382.01 1695,2090 1695,2205 USB.10 USB.9 889.53,2910.47 R16.1 684.53,2910 595,2910
pads on no net: connector1.33 connector1.34 connector1.A9 connector1.A10 connector1.A11 connector1.A12 connector1.A13 connector1.A14 connector1.A15 connector1.A16 connector1.A17 connector1.A18 connector1.A19 connector1.A20 connector1.A21 connector1.A22 connector1.A23 connector1.A24 connector1.A25 connector1.A26 connector1.A27 connector1.A28 connector1.C5 connector1.C6 connector1.C7 connector1.C8 connector1.C9 connector1.C10 connector1.C11 connector1.C12 connector1.C13 connector1.C14 connector1.C15 connector1.C16 connector1.C17 connector1.C18 connector1.C19 connector1.C20 connector1.C21 connector1.C22 connector1.C23 connector1.C24 connector1.C25 connector1.C26 connector1.C27 connector1.C28 GND. IMM0212D05.3 IMM0212D12.3 IMM0212S3V3.3 IMM0212S3V3.8 LPC.6 LPC.11 LPC.14 LPC.17 LPC.18 POWER. SWD.2 SWD.3 SWD.5 SWD.11 SWD.13 SWD.15 SWD.17 SWD.19 USB.8 USB.12 USB.14 USB.15 USB.17 USB.18 USB.19 USB.20 USB.22 USB.23 USB.24 USB.25 USB.26 USB.31 USB.32 USB.33 USB.34 USB.35 USB.36 USB.37 USB.39 USB.40 USB.41 USB.42 USB.43 USB.44 USB.45 USB.46 USB.47 USB.49 USB.50 USB.51 USB.52

## Polygon pours and split planes (outlines as drawn)
GND on Ground Plane (split plane): 6138.9,-196.9 -119.9,-196.9 -119.9,3699.9 6138.9,3699.9

## Keep-outs
Keep-Out Layer:
  the board outline again, w10

## Silkscreen, mask and mechanical layers (free items; w line width, h text height)
Top Overlay:
  text "7" at 5990,3290 h60
  text "8" at 6005,2805 h60
  text "1" at 6030,2435 h60
  text "2" at 6025,1950 h60
  text "5" at 6025,1475 h60
  text "6" at 6025,1030 h60
  text "3" at 6025,540 h60
  text "4" at 6020,125 h60

## Text inside footprints (layer, text, board x,y; h text height)
C1: Top Overlay "+" at 2746.77,2520.98 h59.06
C3: Top Overlay "+" at 4859.49,469.02 h59.06 r180
C5: Top Overlay "+" at 3028.86,319.02 h59.06 r180
connector1: Top Overlay "11" at 407.36,2270 h59.06 r90; Top Overlay "21" at 407.36,1265 h59.06 r90; Top Overlay "1" at 406.3,3290.79 h59.06 r90; Top Overlay "c" at 319.68,3352.99 h59.06 r90; Top Overlay "b" at 219.68,3352.99 h59.06 r90; Top Overlay "a" at 119.68,3352.99 h59.06 r90; Top Overlay "32" at 407.36,175 h59.06 r90; Mechanical 1 "PCB Edge" at -128.35,-79.53 h23.62 r90